# EAGLE board fpv-diversity (EAGLE 9.6.2)
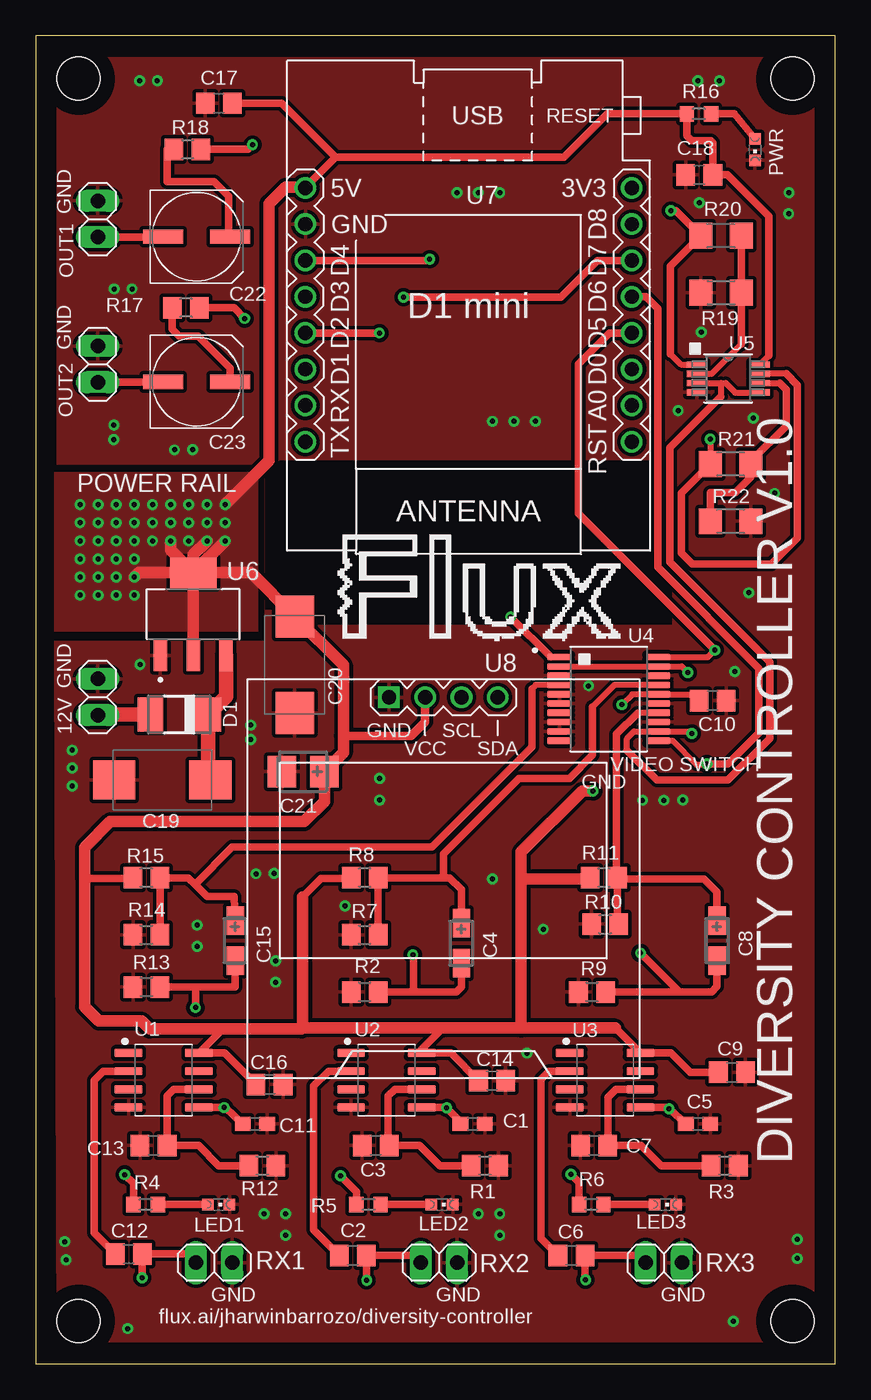
[diagram p0: board, top side]
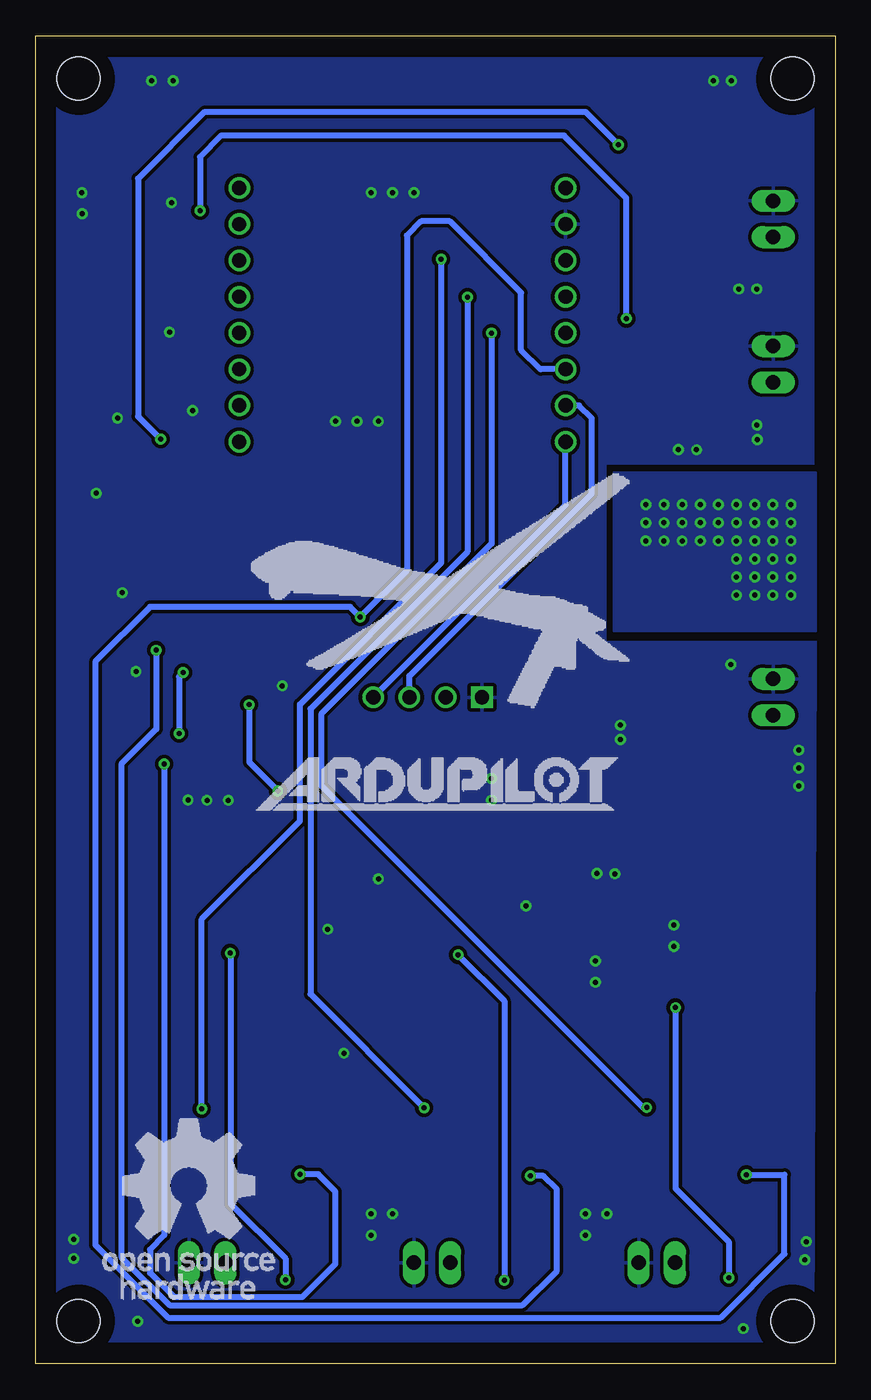
[diagram p1: board, bottom side, seen from below]

Size 56 x 93 mm. Coordinates in mm from the lower left corner, seen from the top.
Outline: 0,0 56,0 56,93 0,93 0,0
Copper layers (1*16): Top 0.035mm / dielectric 1.5mm / Bottom 0.035mm
Design rules "default": minimum track width 6mil, minimum drill 0.35mm, track to track 6mil, track to pad 6mil, pad to pad 6mil, via to via 6mil, smd to smd 6mil, copper to edge 40mil, drill to drill 6mil, minimum pad ring 10mil, minimum via ring 8mil, stop-mask expansion 4mil, vias tented up to drill 0mil, thermal gap 10mil
Holes 3 mm at 3,90 53,90 53,3 3,3

## Footprints (pad centres in the part's own frame; a part is rotated, then mirrored left to right if it is on the bottom)
1X02 = drill 1.016 long: 1 -1.27,0; 2 1.27,0
C0603 = smd 1.1 x 1: 1 -0.85,0; 2 0.85,0
C0805 = smd 1.3 x 1.5: 1 -0.95,0; 2 0.95,0
CT3216 = smd 2 x 1.2: + -1.4,0; - 1.4,0
D/7343-31W = smd 2.95 x 2.7: + 3.375,0; - -3.375,0
CT3528 = smd 2 x 2.2: + -1.5,0; - 1.5,0
UD-6,3X7,7_NICHICON = smd 2.8 x 1: + 2.35,0; - -2.35,0
DO-214AC = smd 1.8 x 2.4: A 2.025,0; C -2.025,0
CHIPLED_0603 = smd 0.8 x 0.8: A 0,-0.75; C 0,0.75
R0805 = smd 1.3 x 1.5: 1 -0.95,0; 2 0.95,0
R0603 = smd 1 x 1.1: 1 -0.85,0; 2 0.85,0
R1206 = smd 1.6 x 1.803: 1 -1.422,0; 2 1.422,0
SOIC127P599X175-8N = smd 1.965 x 0.602: 1 -2.47,1.905; 2 -2.47,0.635; 3 -2.47,-0.635; 4 -2.47,-1.905; 5 2.47,-1.905; 6 2.47,-0.635; 7 2.47,0.635; 8 2.47,1.905
SOP65P777X199-20N = smd 1.7 x 0.48: 1 -3.46,2.925; 2 -3.46,2.275; 3 -3.46,1.625; 4 -3.46,0.975; 5 -3.46,0.325; 6 -3.46,-0.325; 7 -3.46,-0.975; 8 -3.46,-1.625; 9 -3.46,-2.275; 10 -3.46,-2.925; 11 3.46,-2.925; 12 3.46,-2.275; 13 3.46,-1.625; 14 3.46,-0.975; 15 3.46,-0.325; 16 3.46,0.325; 17 3.46,0.975; 18 3.46,1.625; 19 3.46,2.275; 20 3.46,2.925
MSOP-8_MS = smd 1.397 x 0.432: 1 -2.21,0.975; 2 -2.21,0.325; 3 -2.21,-0.325; 4 -2.21,-0.975; 5 2.21,-0.975; 6 2.21,-0.325; 7 2.21,0.325; 8 2.21,0.975
SOT230P700X180-4N = smd 2.15 x 0.95: 1 -2.9,2.3; 2 -2.9,0; 3 -2.9,-2.3 | smd 2.15 x 3.25: 4 2.9,0
WEMOS-D1-MINI = drill 1: JP1.1 -11.43,9.525; JP1.2 -11.43,6.985; JP1.3 -11.43,4.445; JP1.4 -11.43,1.905; JP1.5 -11.43,-0.635; JP1.6 -11.43,-3.175; JP1.7 -11.43,-5.715; JP1.8 -11.43,-8.255; JP2.1 11.43,9.525; JP2.2 11.43,6.985; JP2.3 11.43,4.445; JP2.4 11.43,1.905; JP2.5 11.43,-0.635; JP2.6 11.43,-3.175; JP2.7 11.43,-5.715; JP2.8 11.43,-8.255
DISPLAY-OLED-128X64-I2C = drill 1 square: 1 -3.81,12.7 | drill 1: 2 -1.27,12.7; 3 1.27,12.7; 4 3.81,12.7

## Placement (x,y rotation side)
12V  [1X02]  4.34,46.7 90 top
C1  1nF  [C0603]  30.61,16.8 0 top
C2  100nF  [C0805]  22.21,7.59 180 top
C3  100nF  [C0805]  23.81,15.29 180 top
C4  47uF  [CT3216]  29.81,29.46 270 top
C5  1nF  [C0603]  46.39,16.8 0 top
C6  100nF  [C0805]  37.53,7.59 180 top
C7  100nF  [C0805]  39.12,15.29 180 top
C8  47uF  [CT3216]  47.72,29.63 270 top
C9  100nF  [C0805]  48.76,20.42 0 top
C10  100nF  [C0805]  47.41,46.44 0 top
C11  1nF  [C0603]  15.36,16.8 0 top
C12  100nF  [C0805]  6.52,7.69 180 top
C13  100nF  [C0805]  8.26,15.29 180 top
C14  100nF  [C0805]  31.96,19.83 0 top
C15  47uF  [CT3216]  13.98,29.63 270 top
C16  100nF  [C0805]  16.38,19.56 0 top
C17  100nF  [C0805]  12.83,88.27 180 top
C18  100nF  [C0805]  46.48,83.25 180 top
C19  10uF  [D/7343-31W]  8.86,40.88 0 top
C20  33uF  [D/7343-31W]  18.15,48.96 90 top
C21  4.7uF  [CT3528]  18.73,41.47 180 top
C22  470uF  [UD-6,3X7,7_NICHICON]  11.26,78.92 0 top
C23  470uF  [UD-6,3X7,7_NICHICON]  11.26,68.77 0 top
D1  [DO-214AC]  10.05,45.47 180 top
LED1  [CHIPLED_0603]  12.82,11.16 270 top
LED2  [CHIPLED_0603]  28.46,11.16 270 top
LED3  [CHIPLED_0603]  44.1,11.16 270 top
OUT1  [1X02]  4.34,80.17 90 top
OUT2  [1X02]  4.34,70 90 top
PWR  [CHIPLED_0603]  50.38,85.03 180 top
R1  680K  [R0805]  31.46,13.87 180 top
R2  75  [R0805]  23.04,26.04 0 top
R3  680K  [R0805]  48.26,13.87 180 top
R4  120  [R0603]  7.7,11.16 180 top
R5  120  [R0603]  23.3,11.16 180 top
R6  120  [R0603]  38.91,11.16 180 top
R7  1K  [R0805]  23.04,30.04 0 top
R8  4.7K  [R0805]  23.04,34.04 180 top
R9  75  [R0805]  38.96,26.04 0 top
R10  1K  [R0805]  39.88,30.79 0 top
R11  4.7K  [R0805]  39.79,34.04 180 top
R12  680K  [R0805]  15.88,13.87 180 top
R13  75  [R0805]  7.76,26.39 0 top
R14  1K  [R0805]  7.76,30.04 0 top
R15  4.7K  [R0805]  7.76,34.04 180 top
R16  120  [R0603]  46.45,87.53 180 top
R17  75  [R0805]  10.52,73.95 180 top
R18  75  [R0805]  10.63,85.05 0 top
R19  499  [R1206]  48,75 180 top
R20  499  [R1206]  48,79 0 top
R21  499  [R1206]  48.68,63 0 top
R22  499  [R1206]  48.68,59 0 top
RX1  [1X02]  12.5,7.08 0 top
RX2  [1X02]  28.25,7.08 0 top
RX3  [1X02]  43.99,7.08 0 top
U1  LM1881M/NOPB  [SOIC127P599X175-8N]  8.97,19.86 0 top
U2  LM1881M/NOPB  [SOIC127P599X175-8N]  24.56,19.86 0 top
U3  LM1881M/NOPB  [SOIC127P599X175-8N]  39.88,19.86 0 top
U4  MAX4545CAP+  [SOP65P777X199-20N]  40.13,46.56 0 top
U5  LT6206CMS8PBF  [MSOP-8_MS]  48.51,69 0 top
U6  LM1117IMP-5.0-NOPB  [SOT230P700X180-4N]  11.03,52.5 90 top
U7  WEMOS-D1-MINI  [WEMOS-D1-MINI]  30.32,74.09 180 top
U8  DISPLAY-OLED-128X64-I2C  [DISPLAY-OLED-128X64-I2C]  28.55,33.97 0 top

## Library data of the parts
12V OUT1 OUT2 RX1-RX3 = pinhead
C1-C23 = rcl; SPICEPREFIX: C
D1 = diode
LED1-LED3 PWR = led
R1-R22 = rcl; SPICEPREFIX: R
U1-U3 = LM1881M_NOPB; AVAILABILITY: Warning; DESCRIPTION: Video Sync Separator 8-SOIC 0 to 70; MF: Texas Instruments; MP: LM1881M/NOPB; PACKAGE: SOIC-8 Texas Instruments; PRICE: None; PURCHASE-URL: https://pricing.snapeda.com/search/part/LM1881M/NOPB/?ref=eda
U4 = MAX4545CAP_; AVAILABILITY: Warning; DESCRIPTION: Video Switch IC 4 Channel 20-SSOP; MF: Maxim Integrated; MP: MAX4545CAP+; PACKAGE: SSOP-20 Maxim; PRICE: None; PURCHASE-URL: https://pricing.snapeda.com/search/part/MAX4545CAP+/?ref=eda
U5 = LT6206CMS8PBF; AVAILABILITY: Good; DESCRIPTION: Video Amp, 2 Voltage Feedback 8-MSOP; MF: Analog Devices; MP: LT6206CMS8#PBF; PACKAGE: MSOP-8 Analog Devices; PRICE: None
U6 = LM1117IMP-5.0-NOPB; AVAILABILITY: Good; DESCRIPTION: 800-mA 15-V linear voltage regulator 4-SOT-223 -40 to 125; MF: Texas Instruments; MP: LM1117IMP-5.0/NOPB; PACKAGE: SOT-223-4 Texas Instruments; PRICE: None; PURCHASE-URL: https://pricing.snapeda.com/search/part/LM1117IMP-5.0/NOPB/?ref=eda
U7 = diy-modules
U8 = DISPLAY-OLED-128X64-I2C-3D

## Nets
3V3: U7.JP1.8
5V: C9.1 C10.1 C14.1 C16.1 C17.1 C18.1 C20.+ C21.+ R8.2 R11.2 R15.2 R16.2 U1.8 U2.8 U3.8 U4.16 U5.8 U6.2 U6.4 U7.JP2.8 U8.2
BPOUT1: C11.1 U1.5 U7.JP2.4
BPOUT2: C1.1 U2.5 U7.JP1.6
BPOUT3: C5.1 U3.5 U7.JP2.6
GND: 12V.2 C1.2 C3.2 C5.2 C7.2 C9.2 C10.2 C11.2 C13.2 C14.2 C16.2 C17.2 C18.2 C19.- C20.- C21.- LED1.C LED2.C LED3.C OUT1.2 OUT2.2 PWR.C R1.1 R2.1 R3.1 R7.1 R9.1 R10.1 R12.1 R13.1 R14.1 R19.2 R22.2 RX1.2 RX2.2 RX3.2 U1.4 U2.4 U3.4 U4.3 U4.5 U4.6 U4.8 U4.9 U4.13 U4.15 U4.18 U5.4 U6.1 U7.JP2.7 U8.1
IN1: R4.2 U4.1 U7.JP2.3
IN2: R5.2 U4.20 U7.JP1.4
IN3: R6.2 U4.11 U7.JP1.5
N01: C15.+ R14.2 R15.1 U4.4
N02: C4.+ R7.2 R8.1 U4.17
N03: C8.+ R10.2 R11.1 U4.14
N$1: C7.1 R3.2 U3.6
N$2: C3.1 R1.2 U2.6
N$3: C2.2 U2.2
N$4: PWR.A R16.1
N$5: C6.2 U3.2
N$6: 12V.1 D1.A
N$7: LED1.A R4.1
N$8: LED2.A R5.1
N$9: LED3.A R6.1
N$10: C13.1 R12.2 U1.6
N$11: C12.2 U1.2
N$12: R19.1 R20.2 U5.2
N$13: R18.2 R21.1 U5.7
N$14: R21.2 R22.1 U5.6
N$15: R17.1 R20.1 U5.1
N$16: C22.+ R18.1
N$17: C23.+ R17.2
PRE-VOUT: U4.2 U4.12 U4.19 U5.3 U5.5
SCL: U7.JP2.2 U8.3
SDA: U7.JP2.1 U8.4
VCC: C19.+ D1.C U6.3
VID1: C12.1 C15.- R13.2 RX1.1
VID2: C2.1 C4.- R2.2 RX2.1
VID3: C6.1 C8.- R9.2 RX3.1
VOUT1: C22.- OUT1.1
VOUT2: C23.- OUT2.1

## Tracks (layer width: path | path; a pad name or v marks a point on that pad's centre or on a via)
5V  (via drill 0.35)
  Top 0.2: 27.03,22.03 U2.8 | 18.89,82.39 U7.JP2.8
  Top 0.305: 46.01,46.89 C10.1
  Top 0.406: 42.37,21.79 U3.8 | 51.34,70.6 U5.8 | v41.05,46.16 41.78,46.89 U4.16 46.01,46.89
  Top 0.508: 42.37,21.79 44.49,21.79 45.86,20.42 C9.1 | 40.6,23.52 U3.8 | 28.52,23.52 27.03,22.03 | 13.12,23.44 U1.8 13.22,21.77 C16.1 | U2.8 29.08,21.77 C14.1 | 51.34,70.6 51.34,80.36 48.44,83.25 C18.1 47.43,85.51 47.28,85.66 45.94,85.66 45.6,86 R16.2 40.03,87.53 37,84.5 21,84.5 | R15.2 6.3,34 3.42,34 | R8.2 21.58,34 20,34 18.7,32.7 | 21,84.5 18.89,82.39 | C17.1 17.23,88.27 21,84.5 | 20.23,41.89 C21.+
  Top 0.61: U8.2 27.28,44.95 26.3,43.97 21.55,43.97
  Top 0.813: 40.6,23.52 34,23.52 | 34,23.52 28.52,23.52 18.7,23.52 | v39.03,40.11 38.28,40.11 34,35.83 34,33.97 | 18.7,32.7 18.7,23.52 | U6.4 U6.2 | 18.7,23.52 18.62,23.44 13.12,23.44 7.97,23.44 7.41,24 4.42,24 3.42,25 3.42,34 3.42,36.16 5.23,37.97 18.8,37.97 20.23,39.39 C21.+ 21.55,42.79 21.55,43.97 21.55,48.93 C20.+ | 18.89,82.39 17.49,82.39 16.35,81.25 16.35,63.25 v13.26,60.17 | U6.4 7.22,55.4 v6.91,55.09 | U6.4 11.03,56.67 v11.99,57.63 | v13.26,57.63 U6.4 | U6.4 9.45,56.98 v9.45,57.63 | C20.+ 15.08,55.4 U6.4 | 18.28,52.47 C20.+ | 34,33.97 34,23.52 | R11.2 38.77,33.97 34,33.97
  Bottom 0.406: v41.05,46.16 41.05,42.13 v39.03,40.11
  other vias: 5.64,58.9 6.91,58.9 8.18,58.9 9.45,58.9 10.72,58.9 5.64,57.63 6.91,57.63 8.18,57.63 10.72,57.63 11.99,58.9 13.26,58.9 6.91,56.36 5.64,56.36 5.64,55.09 5.64,53.82 6.91,53.82 4.37,58.9 4.37,57.63 4.37,56.36 4.37,55.09 4.37,53.82 11.99,60.17 10.72,60.17 9.45,60.17 8.18,60.17 6.91,60.17 5.64,60.17 4.37,60.17 3.1,60.17 3.1,58.9 3.1,57.63 3.1,56.36 3.1,55.09 3.1,53.82
  pour Top: 1.32,62.45 15.55,62.45 15.55,51.28 1.32,51.28
  pour Bottom: 1.32,62.45 15.55,62.45 15.55,51.28 1.32,51.28
BPOUT1  (via drill 0.35)
  Top 0.2: v24.07,72.19 | v13.19,17.96 v13.21,17.94
  Top 0.508: U7.JP2.4 v24.07,72.19 | U1.5 v13.19,17.96 | v13.21,17.94 13.27,17.94 C11.1
  Bottom 0.406: v24.07,72.19 24.07,57.43 36,45.5 36,40.49 13.46,17.94 v13.21,17.94
BPOUT2  (via drill 0.35)
  Top 0.2: 25.73,74.73 v25.77,74.69 | 28.77,17.96 v28.79,17.93
  Top 0.508: U2.5 28.77,17.96 | v28.79,17.93 29.83,16.89 C1.1 | v25.77,74.69 36.77,74.69 39.35,77.27 U7.JP1.6
  Bottom 0.406: v25.77,74.69 25.77,56.85 36.75,45.87 36.75,25.89 v28.79,17.93
BPOUT3  (via drill 0.35)
  Top 0.2: 27.51,77.27 v27.6,77.35 | v44.36,17.86 44.27,17.96
  Top 0.508: U7.JP2.6 27.51,77.27 | U3.5 44.27,17.96 | v44.36,17.86 44.38,17.86 C5.1
  Bottom 0.406: v27.6,77.35 27.6,56.08 37.5,46.18 37.5,38 44.36,31.14 v44.36,17.86
GND  (via drill 0.35)
  Top 0.2: C9.2 49.9,20.23
  Top 0.406: U5.4 46.27,68
  Top 0.508: 6.45,40.9 C19.-
  Top 0.61: U6.1 8.73,49.33 | C19.- 6.31,40.73
  other vias: 5.48,65.74 2.55,42.97 24.08,40.99 7.3,48.97 11.3,29.22 16.7,34.34 21.67,32.07 34.41,21.75 35.55,30.43 32,33.96 49.94,53.99 45,66.75 8.52,89.84 7.28,89.84 5.5,75.27 50.27,66.21 46.63,72.25 46.49,81.32 6.75,75.27 5.45,64.72 2.55,40.47 52.73,80.54 52.76,82 29.5,82 31,82 32.5,82 32,66 33.5,66 35,66 51.75,60.96 44.01,39.46 45.34,39.48 42.51,39.46 31,10.5 32.5,10.5 32.5,9 16,10.5 17.5,10.5 17.5,9 48.98,48.48 11.3,30.72 15.43,34.32 2.55,41.72 9.71,64 10.98,64.03 24.08,39.47 16.8,28.22 16.8,26.72 46.37,89.84 47.89,89.84 48.86,2.97 53.34,7.37 2.12,7.29 6.45,2.47 53.34,8.73 2.04,8.56 15.05,44.72 15.05,43.72 38.73,47.48
  pour Bottom (isolate 0.254): 1.49,91.51 1.49,62.96 16.05,62.96 16.05,50.6 1.33,50.6 1.49,1.49 54.52,1.49 54.52,91.51
  pour Top (isolate 0.254): 1.5,91.5 54.5,91.5 54.5,1.5 1.5,1.5 1.32,49.75 1.32,50.01 1.32,50.6 16.05,50.6 16.05,62.96 1.5,62.96
  cutout Top: 44.55,63.21 17.07,63.21 16.05,62.2 16.05,52.85 17.36,52.85 18.4,51.82 44.55,51.82
IN1  (via drill 0.35)
  Top 0.406: U4.1 36.07,49.49
  Top 0.508: 36.07,49.49 v33.26,52.29 | v6.23,13.25 6.85,12.63 R4.2
  Bottom 0.406: v6.23,13.25 3.56,13.25 3.56,7.69 8.02,3.24 46.73,3.24 51.82,8.33 51.82,49.18 48,53 33.97,53 v33.26,52.29 30,55.56 30,79 29,80 27,80 22,75 22,71 20.64,69.65 U7.JP2.3
IN2  (via drill 0.35)
  Top 0.406: U4.20 47.07,49.49 v47.56,49.97
  Top 0.508: v47.56,49.97 38,59.53 38,70 40.18,72.19 U7.JP1.4 | v21.35,13.16 22.45,12.05 R5.2
  Bottom 0.406: v47.56,49.97 47.56,44.44 50,42 50,7.47 46.63,4.1 21.9,4.1 19.51,6.49 19.51,12.24 20.43,13.16 v21.35,13.16
IN3  (via drill 0.35)
  Top 0.406: U4.11 44.61,43.64 46.28,41.97 46.96,41.97 v47,42
  Top 0.508: U7.JP1.5 42.75,74.73 43.58,73.9 43.58,55.78 50.66,48.7 50.66,44.17 48.49,42 v47,42 | v37.49,13.27 38.06,12.7 R6.2
  Bottom 0.406: v47,42 47,9 48,8 48,6.37 46.32,4.68 37.32,4.68 35,7 35,12.05 36.22,13.27 v37.49,13.27
N01
  Top 0.406: U4.4 35.03,47.54 34.75,47.25
  Top 0.508: 34.75,47.25 34.75,43.18 27.74,36.18 13.76,36.18 11.15,33.57 | 11.15,33.57 10.68,34.04 R15.1 R14.2 | 11.15,33.57 11.99,32.73 13.89,32.73 C15.+
N02
  Top 0.406: U4.17 40.53,47.54 39,46
  Top 0.508: 39,46 39,42.63 37.37,41 33.84,41 28.55,35.72 28.55,34.04 | R7.2 R8.1 28.55,34.04 | C4.+ 29.81,33.21 28.98,34.04 28.55,34.04
N03
  Top 0.406: U4.14 42.17,45.59
  Top 0.508: 42.17,45.59 40.67,44.09 40.67,34.11 R11.1 | C8.+ 47.72,33.03 46.8,33.95 40.83,33.95 R11.1 | R11.1 40.74,30.88 R10.2
N$1
  Top 0.508: U3.6 40.65,19.23 40.07,18.65 C7.1 42.39,15.29 43.8,13.87 R3.2
N$2
  Top 0.305: 24.69,15.36 C3.1
  Top 0.508: U2.6 25.15,19.23 24.69,18.76 24.69,15.36 | C3.1 26.9,15.29 28.31,13.87 R1.2
N$3
  Top 0.508: U2.2 20.49,20.5 19.47,19.47 19.47,9.38 C2.2
N$4
  Top 0.508: R16.1 48.93,87.53 PWR.A
N$5
  Top 0.508: U3.2 35.94,20.5 35.38,19.93 35.38,8.79 C6.2
N$6
  Top 1.016: 12V.1 4.39,45.47 D1.A
N$7
  Top 0.508: LED1.A R4.1
N$8
  Top 0.508: LED2.A R5.1
N$9
  Top 0.508: LED3.A R6.1
N$10
  Top 0.305: C13.1
  Top 0.508: U1.6 9.66,19.23 9.2,18.76 C13.1 | C13.1 11.4,15.29 12.82,13.87 R12.2
N$11
  Top 0.508: U1.2 4.72,20.5 4.09,19.86 4.09,9.17 C12.2
N$12
  Top 0.406: U5.2 47.34,69.33 49.42,71.4
  Top 0.508: R20.2 R19.1 49.42,71.4
N$13  (via drill 0.35)
  Top 0.305: U5.7
  Top 0.406: 52.56,69.32 U5.7 | v47.24,64.74 47.24,63.02 R21.1
  Top 0.508: 52.56,69.32 53.35,68.54 53.35,57.82 51.52,56 46,56 45.21,56.79 45.21,60.96 R21.1 | R18.2 14.86,85.05 v15.18,85.36
  Bottom 0.406: v47.24,64.74 48.83,66.33 48.83,83 44.15,87.68 17.49,87.68 v15.18,85.36
N$14
  Top 0.2: 50.1,63.22 R21.2
  Top 0.406: U5.6 52.11,68.68 | R21.2 50.1,62.1
  Top 0.508: 50.1,63.22 52.56,65.68 52.56,68.22 52.11,68.68 | 50.1,62.1 49,61 47.26,61 R22.1
N$15  (via drill 0.35)
  Top 0.2: U5.1 46.26,70.02
  Top 0.406: U5.1 45.2,69.98 44.46,70.72
  Top 0.508: v44.49,80.75 44.83,80.75 R20.1 44.46,76.88 44.46,70.72 | v14.63,73.2 13.89,73.95 R17.1
  Bottom 0.406: v14.63,73.2 14.63,81.63 19,86 43,86 44.49,84.51 v44.49,80.75
N$16
  Top 0.305: C22.+ 13.51,79.02 | 9.2,85.04 R18.1
  Top 0.508: 13.51,79.02 13.51,81.76 12.5,82.77 9.2,82.77 9.2,85.04
N$17
  Top 0.508: C23.+ 13.61,69.72 11.36,71.97 10.05,71.97 9.57,72.45 R17.2
PRE-VOUT  (via drill 0.35)
  Top 0.2: 50.73,68.01 U5.5 50.69,68
  Top 0.406: U4.2 U4.19 45.25,48.84 v45.67,48.41 | U5.3 48,68.68 | 48,68.68 48.32,68.68 49,68 50.69,68 | 48,68.68 48,67.73 | 41.42,42.95 41.42,43.79 41.91,44.29 U4.12 45.81,44.29 v45.96,44.13
  Top 0.508: 48,67.73 44.42,64.15 44.42,56.13 51.4,49.15 51.4,43.8 48.48,40.87 43.5,40.87 41.42,42.95
  Bottom 0.406: v45.67,48.41 45.96,48.12 v45.96,44.13
SCL
  Bottom 0.406: U8.3 29.82,48.17 17.05,60.94 17.05,66.22 17.94,67.11 U7.JP2.2
SDA
  Bottom 0.406: U8.4 18.89,60.14 U7.JP2.1
VCC
  Top 1.016: U6.3 13.33,46.72 D1.C 12.08,41.04 C19.+
VID1  (via drill 0.35)
  Top 0.2: 7.47,6.03 v7.46,6.02
  Top 0.508: RX1.1 10.62,7.69 C12.1 7.47,6.03 | C15.- 13.96,26.39 11.23,26.39 | 11.23,26.39 R13.2 | v11.19,24.94 11.19,26.35 11.23,26.39
  Bottom 0.406: v11.19,24.94 11.19,12.29 7.46,8.56 v7.46,6.02
VID2  (via drill 0.35)
  Top 0.2: 23.16,5.88 v23.18,5.86
  Top 0.508: RX2.1 26.47,7.59 C2.1 23.16,5.88 | R2.2 26.47,26.04 | 26.47,26.04 29.46,26.04 29.81,26.4 C4.- | v26.41,28.64 26.47,28.59 26.47,26.04
  Bottom 0.406: v26.41,28.64 23.18,25.42 v23.18,5.86
VID3  (via drill 0.35)
  Top 0.2: 38.48,5.91 v38.51,5.88
  Top 0.508: RX3.1 42.21,7.59 C6.1 38.48,5.91 | R9.2 45.09,26.04 | 45.09,26.04 47.35,26.04 47.72,26.41 C8.- | v42.37,28.76 45.09,26.04
  Bottom 0.305: v42.37,28.76 42.33,28.72
  Bottom 0.406: 42.33,28.72 42.33,11.2 38.51,7.38 v38.51,5.88
VOUT1
  Top 0.305: 8.88,78.9 C22.-
  Top 0.508: OUT1.1 8.88,78.9
VOUT2
  Top 0.305: 8.87,68.73 C23.-
  Top 0.508: OUT2.1 8.87,68.73

## Text on the board
tPlace: GND | GND | POWER RAIL | GND | VIDEO SWITCH | GND | DIVERSITY CONTROLLER V1.0 | GND | GND | GND | flux.ai/jharwinbarrozo/diversity-controller